# Altium PCB ON OFF CONTROL.PcbDoc
Units mm, origin at the board's own origin, x right, y up, seen from the top; angles counter-clockwise.
Board outline 47.07 x 105.01 mm, 2 copper layers (Top Layer, Bottom Layer); 35 components, 29 nets, 115 pads, 23 vias.
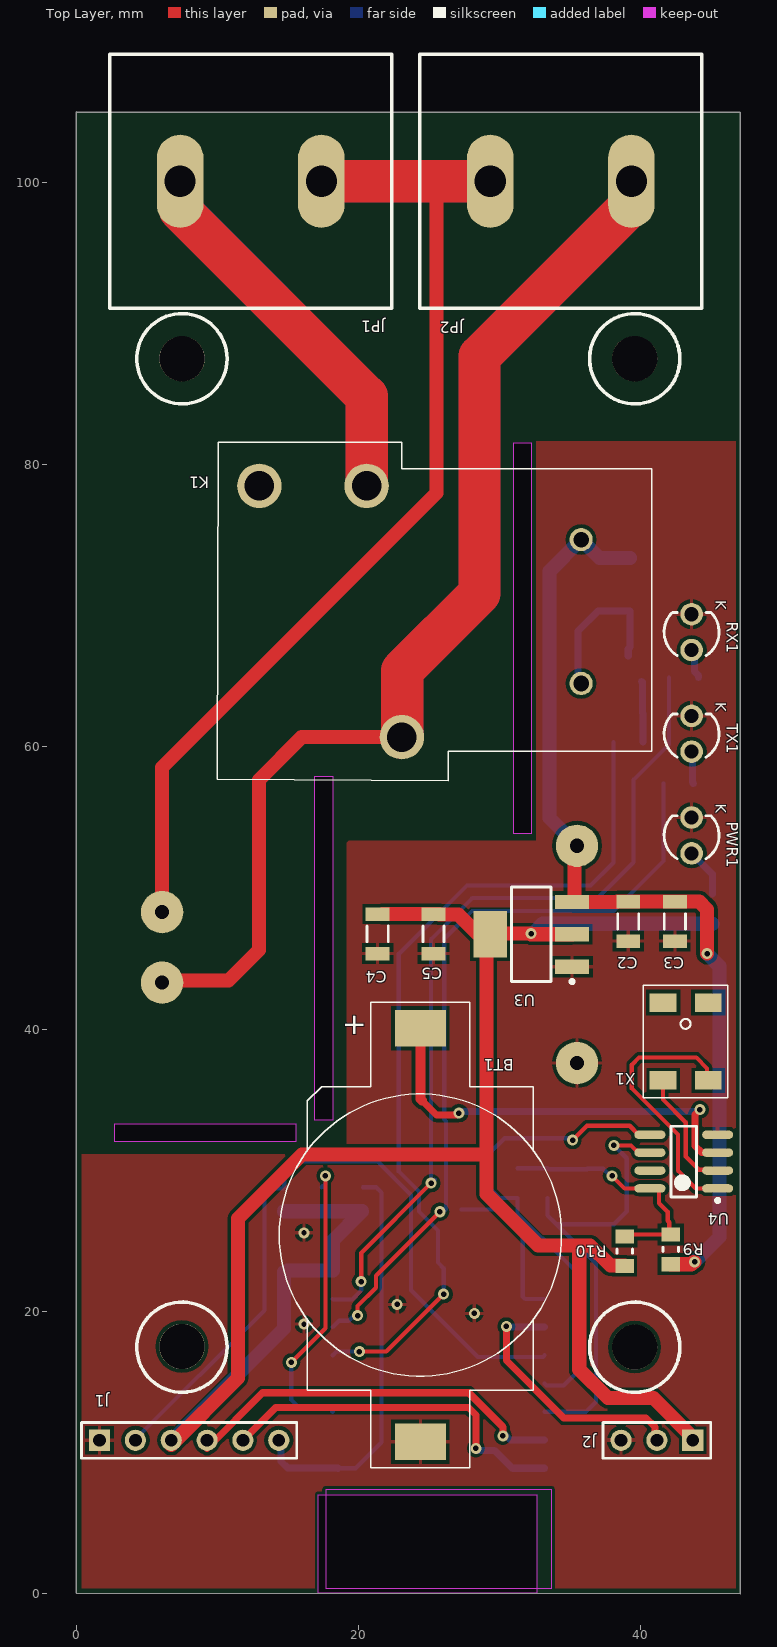
[diagram p0: Top Layer view]
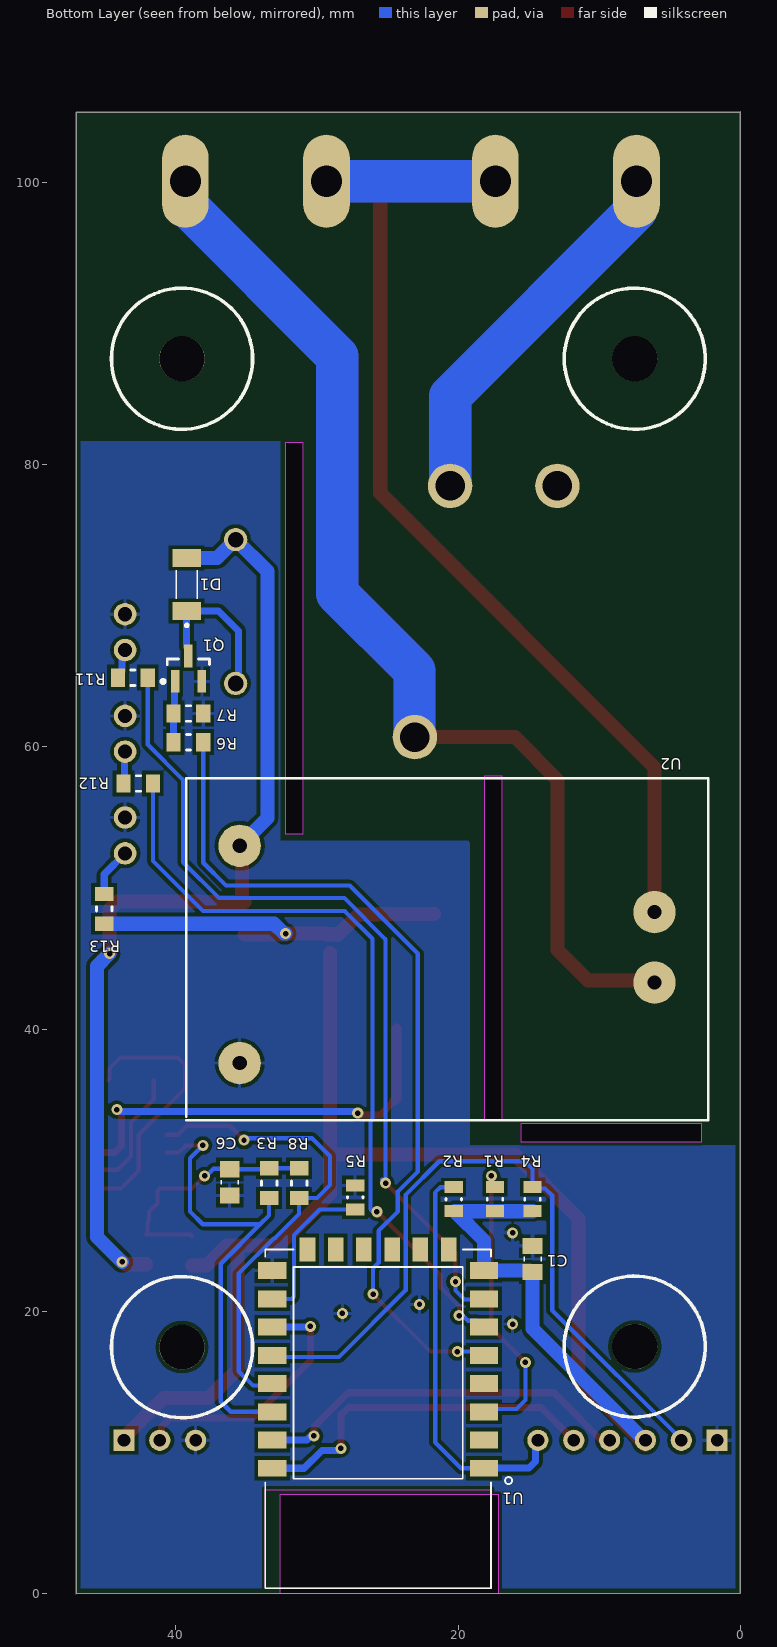
[diagram p1: Bottom Layer view, seen from below]

## Layer stack, top to bottom
Top Solder: solder mask 0.0102, Solder Resist, Dk 3.5
Top Layer: signal copper 0.0356
Dielectric 1: dielectric 0.32, FR-4, Dk 4.8
Bottom Layer: signal copper 0.0356
Bottom Solder: solder mask 0.0102, Solder Resist, Dk 3.5

## Board outline
0,0.004 0,104.994 0.005,104.972 47.059,104.972 47.068,104.979 47.068,-0.011 47.059,-0.018
cut-out: 15.557,32.004 2.73,32.004 2.73,33.274 15.557,33.274
cut-out: 16.891,33.528 16.891,57.912 18.161,57.912 18.161,33.528
cut-out: 32.258,81.534 32.258,53.848 30.988,53.848 30.988,81.534
cut-out: 17.145,0.004 17.145,6.985 32.639,6.985 32.639,0.004

## Design rules (kind name [scope] priority, off if disabled: settings)
Clearance [All] p1: gap=0.254 ignorepadtopadclearanceinfootprint=FALSE except(0: Arc-Hole Track-Hole SMDPad-Hole THPad-Hole Via-Hole Fill-Hole Poly-Hole Region-Hole Text-Hole)
HoleSize [All] p1: absolutevalues=TRUE maxlimit=4 minlimit=0.025 maxpercent=80.000 minpercent=20.000
MinimumSolderMaskSliver [All] p1: minsoldermaskwidth=0.1
PolygonConnect [All] p1: connectstyle=Relief reliefconductorwidth=0.254 reliefentries=4 polygonreliefangle="90 Angle" airgapwidth=0.254
RoutingVias [All] p1: holewidth=0.711 width=1.27 viastyle="Through Hole" minholewidth=0.711 minwidth=1.27 maxholewidth=0.711 maxwidth=1.27
SilkToSolderMaskClearance [IsPad] p1: minsilkscreentomaskgap=0.1 clearancetoexposedcopper=TRUE
SolderMaskExpansion [All] p1: expansion=0.102 istentingtop=FALSE
Width [All] p1: maxlimit=3 minlimit=0.254 preferedwidth=0.254
27 further rules are at their usual default settings.

## Components (designator, comment, footprint, x,y, rotation, side; value= is the part's Value field where it differs from the comment)
BT1 "BATTERY" CR2032_HOLDER_CH28 24.384,25.4 r90 top
C1 "08055C104KAJ2A" CAPC0805 14.732,23.7 r90 bottom
C2 "CAP 2.7uF 10V 1206(3216)" CAPC1206(3216)110_L 39.116,47.625 r90 top value=2.7uF
C3 "CAP 2.7uF 10V 1206(3216)" CAPC1206(3216)110_L 42.418,47.625 r90 top value=2.7uF
C4 "CAP 2.7uF 10V 1206(3216)" CAPC1206(3216)110_L 21.357,46.741 r90 top value=2.7uF
C5 "CAP 2.7uF 10V 1206(3216)" CAPC1206(3216)110_L 25.314,46.741 r90 top value=2.7uF
C6 "0.1UF" CAPC0805 36.195,29.133 r90 bottom
D1 "5.8V zener diode" BZT55B13GS08 39.243,71.501 r90 bottom
J1 "22-23-2061" HDR1X6 1.651,10.858 r0 top
J2 "Header 3" HDR1X3 43.688,10.858 r180 top (schematic designator P1)
JP1 "LOAD" "10 mm pitch" 17.366,100.076 r180 top
JP2 "LOAD" "10 mm pitch" 39.337,100.076 r180 top
K1 "Relays General Purpose Non Latching 12VDC SPDT 30A 250VAC Through Hole RoHS   Source:  Datasheet" R53G112DF1S 20.574,78.486 r180 top
PWR1 "LED" "Type 3mm" 43.605,53.721 r90 top
Q1 "BC847" SOT23-3 39.116,65.532 r90 bottom
R1 "2R55 1% 0805(2012)" RESC0805(2012)_L 17.399,27.94 r270 bottom value="2.55 Ohm"
R2 "2R55 1% 0805(2012)" RESC0805(2012)_L 20.32,27.94 r270 bottom value="2.55 Ohm"
R3 "4.7K" RESC0805 33.401,29.083 r270 bottom
R4 "2R55 1% 0805(2012)" RESC0805(2012)_L 14.732,27.94 r270 bottom value="2.55 Ohm"
R5 "2R55 1% 0805(2012)" RESC0805(2012)_L 27.305,28.067 r270 bottom value="2.55 Ohm"
R6 "1K" RESC0805 39.116,60.325 r180 bottom
R7 "100K" RESC0805 39.116,62.357 r180 bottom
R8 "4.7K" RESC0805 31.276,29.083 r270 bottom
R9 "0" RESC0805 42.128,24.384 r90 top
R10 "0" RESC0805 38.862,24.257 r90 top
R11 "1K" RESC0805 43.053,64.897 r180 bottom
R12 "1K" RESC0805 42.672,57.404 r180 bottom
R13 "1K" RESC0805 45.085,48.514 r270 bottom
RX1 "LED" "Type 3mm" 43.605,68.126 r90 top
TX1 "LED" "Type 3mm" 43.605,60.923 r90 top
U1 "ESP8266-12E/ESP-12E" *XCVR_ESP8266-12E/ESP-12E 25.68,15.875 r0 bottom
U2 "230v to5v" 230V-5V 21.209,44.704 r0 bottom
U3 "LM1117MPX-3.3" MP04A_N 32.235,46.713 r180 top
U4 "DS1307" SOIC8 43.053,30.607 r180 top
X1 "32.768" CRYSTAL_32.768_SMD 43.18,39.116 r90 top

## Footprints (in the part's own frame and the unit in brackets; to place one, negate y for a bottom-side part, rotate by r counter-clockwise, add the part's x,y. Pads: shape width x height; smd on the part's side, far side on the other; paste and mask are expansions set on the pad)
"10 mm pitch" [mm]
  oval 3.3x6.6 hole 2.2: 1(0,0) 2(10,0)
  silkscreen extent -5,-9 15,9
230V-5V [mm]
  round 3 hole 1: 1(-15.123,1.419) 2(-15.123,-3.581) 3(14.277,7.119) 4(14.277,-8.281)
  silkscreen extent -18.92,-13.08 18.08,11.18
*XCVR_ESP8266-12E/ESP-12E [mm]
  rect 2x1.2 smd: 1(-7.5,7) 2(-7.5,5) 3(-7.5,3) 4(-7.5,1) 5(-7.5,-1) 6(-7.5,-3) 7(-7.5,-5) 8(-7.5,-7) 15(7.5,-7) 16(7.5,-5) 17(7.5,-3) 18(7.5,-1) 19(7.5,1) 20(7.5,3) 21(7.5,5) 22(7.5,7)
  rect 1.1x1.7 smd: 9(-5,-8.5) 10(-3,-8.5) 11(-1,-8.5) 12(1,-8.5) 13(3,-8.5) 14(5,-8.5)
  Keep-Out Layer region: -8.009,15.5 8,15.5 8,8.51 -8.009,8.51
  Keep-Out Layer region: -8.009,15.5 8,15.5 8,8.51 -8.009,8.51
  Keep-Out Layer region: -8.009,15.5 8,15.5 8,8.51 -8.009,8.51
  Keep-Out Layer region: -8.009,15.5 8,15.5 8,8.51 -8.009,8.51
  Keep-Out Layer region: -8.009,15.5 8,15.5 8,8.51 -8.009,8.51
  Keep-Out Layer region: -8.009,15.5 8,15.5 8,8.51 -8.009,8.51
  silkscreen extent -9.5,-8.5 8,15.5
BZT55B13GS08 [mm]
  rect 1.25x2 smd: 1(-1.875,0) 2(1.875,0)
  silkscreen extent -3,-0.75 1,0.75
CAPC0805 [mm]
  rect 1.15x1.4 smd: 1(-0.925,0) 2(0.925,0)
  silkscreen extent -0.15,-0.6 0.15,0.6, body extent -1.1,-0.67 1.1,0.67, height 0.8
CAPC1206(3216)110_L [mm] "Chip Capacitor, Body 3.2x1.6mm, Height 1.1mm, IPC High Density"
  rect 0.95x1.7 smd: 1(-1.4,0) 2(1.4,0)
  silkscreen extent -0.55,-0.75 0.55,0.75, body extent -1.7,-0.9 1.7,0.9, height 1.1
CR2032_HOLDER_CH28 [mm]
  rect 2.6x3.6 smd: 1(14.65,0) 2(-14.65,0)
  silkscreen extent -16.5,-10 16.5,10, body extent -16.5,-10 16.5,10, height 7
CRYSTAL_32.768_SMD [mm]
  rect 1.3x1.9 smd: 1(-2.75,-1.6) 2(-2.75,1.6) ""(2.75,-1.6) ""(2.75,1.6)
  silkscreen extent -4,-3 4,3, body extent -4,-1.75 4,1.75, height 2.5
HDR1X3 [mm] "Connector; Header; 3 Position"
  rect 1.5x1.5 hole 0.9: 1(0,0)
  round 1.5 hole 0.9: 2(2.54,0) 3(5.08,0)
  silkscreen extent -1.27,-1.27 6.35,1.27
HDR1X6 [mm] "Connector; Header; 6 Position"
  rect 1.5x1.5 hole 0.9: 1(0,0)
  round 1.5 hole 0.9: 2(2.54,0) 3(5.08,0) 4(7.62,0) 5(10.16,0) 6(12.7,0)
  silkscreen extent -1.27,-1.27 13.97,1.27
MP04A_N [mm] "SOT223, 4-Leads, Body 6.5x3.5mm, Pitch 2.3mm, Lead Span 7mm, IPC Medium Density"
  rect 2.4x1 smd: 1(-2.9,2.3) 2(-2.9,0) 3(-2.9,-2.3)
  rect 2.4x3.3 smd: 4(2.9,0)
  silkscreen extent -3.03,-3.35 1.4,3.47, body extent -1.86,-3.35 1.86,3.35, height 1.8
R53G112DF1S [mm]
  round 3.15 hole 2.1: 1(0,0) 2(7.6,0) 3(-2.5,17.8)
  round 1.65 hole 1.1: 4(-15.2,3.8) 5(-15.2,14)
  silkscreen extent -20.2,-3.1 10.6,20.9
RESC0805 [mm]
  rect 1x1.3 smd: 1(-1.05,0) 2(1.05,0)
  silkscreen extent -0.15,-0.55 0.15,0.55, body extent -1.1,-0.62 1.1,0.63, height 0.6
RESC0805(2012)_L [mm] "Chip Resistor, Body 2.0x1.3mm, IPC High Density"
  rect 0.85x1.3 smd: 1(-0.85,0) 2(0.85,0)
  silkscreen extent -0.05,-0.55 0.05,0.55, body extent -1.1,-0.67 1.1,0.68, height 0.7
SOIC8 [mm]
  oval 2.2x0.6 smd: 1(-2.4,1.905) 2(-2.4,0.635) 3(-2.4,-0.635) 4(-2.4,-1.905) 5(2.4,-1.905) 6(2.4,-0.635) 7(2.4,0.635) 8(2.4,1.905)
  silkscreen extent -2.53,-2.5 0.9,2.88, body extent -2,-2.5 2,2.5, height 1.75
SOT23-3 [mm]
  rect 1.6x0.6 smd: 1(-0.9,0.95) 2(-0.9,-0.95) 3(0.9,0)
  silkscreen extent -1.02,-1.5 0.7,1.93, body extent -0.7,-1.5 0.7,1.5, height 1.1
"Type 3mm" [mm] "THT, LED-3mm, 2pin- Body 4.15mm(max)"
  round 1.6 hole 1: 1(1.27,0) 2(-1.27,0)
  silkscreen extent -1.66,-1.95 1.4,1.95, body extent -1.93,-1.94 1.87,1.94, height 10.5

## Part data
C1: library part CMP-2007-04765-1, Manufacturer="AVX Interconnect / Elco", Part Number=08055C104KAJ2A
C2 C3 C4 C5: library part CMP-1037-04841-1, "CAP 2.7uF 10V ±10% 1206 (3216 Metric) Thickness 1.05mm SMD", Case-EIA=1206, Case-Metric=3216, Rated Voltage="10 V", Tolerance=Â±10%, Max Thickness="1.05 mm", Technology=SMT
C6: library part "CAP NP"
D1: library part DIODE
J1: library part CMP-2000-05536-1, "Male Header, Pitch 2.54 mm, 1 x 6 Position, Height 10.67 mm, Tail Length 3.56 mm, 0 to 70 degC, RoHS, Bulk", Current Rating=4A, Manufacturer=Molex, Package Description="Male Header, Pitch 2.54 mm, 1 x 6 Position, Height 10.67 mm, Tail Length 3.56 mm", Voltage Rating=250V, =002223206122-23-2061-PBA-6373-06A102, Brand=Molex, Contact Material=Brass, Contact Plating=Tin, Datasheet URL=https://datasheet.ciiva.com/19460/232303-19460895.pdf, Datasheet Version="Rev. P, 09/2001", Factory Pack Quantity=1000, Housing Material=Nylon, Manufacturer URL=http://www.molex.com/, Mounting Angle=Vertical, Mounting Style=ThroughHole, Mounting Technology=ThroughHole, Number of Positions=6, Number of Positions / Contacts=6, Number of Rows=1, Package Reference=22-23-2061, Packaging=Bulk, Pitch=2.54mm, Product Category=.100K.K.Connectors, Product Type=Headers, RoHS=Details, Series=6373, Termination Style=ThroughHole, Tradename=KK, Type=PinStrip
J2: "Header, 3-Pin", LatestRevisionDate=17-Jul-2002, LatestRevisionNote="Re-released for DXP Platform.", Publisher="Altium Limited"
JP1 JP2: library part "HEADER 2"
K1: library part R53G-112DF-1-S, Manufacturer_Name=WRG(Wangrong), Package=R53G112DF1S, DeviceSetName=R53G-112DF-1-S, GateName_1=G$1, Height=20.3mm, LibraryName=R53G-112DF-1-S, Manufacturer_Part_Number=R53G-112DF-1-S, SymbolName_1=R53G-112DF-1-S
Q1: library part "NPN BEC"
R1 R2 R4 R5: library part CMP-1013-00215-1, "2R55 0.125W 1% 0805 (2012 Metric)  SMD", Case-EIA=0805, Case-Metric=2012, Power="0.125 W", Tolerance="1 %", Technology=SMT
R3 R6 R7 R8 R9 R10 R11 R12 R13: library part RES1, "RESISTOR"
U1: "This WiFi module has a 32-bit MCU micro and clock speeds supporting 80 MHz or 160 MHz. Supports the RTOS and integrated Wi-Fi MAC/BB/RF/PA/LNA, and has an on-board antenna.", Package=None, Availability=Unavailable, MF=AI-Thinker, MP=ESP8266-12E/ESP-12E, Price=None, SnapEDA_Link=https://www.snapeda.com/parts/ESP8266-12E/ESP-12E/AI-Thinker/view-part/?ref=snap
U3: library part CMP-0062-01659-3, "800mA Low-Dropout Linear Regulator, 4-pin SOT-223", Manufacturer="National Semiconductor", PackageTopMarking=XYTT*N05A, PowerWise=N, Code_IPC=SOT223-4, Code_JEDEC=TO-261-AA, ComponentLink1Description="Manufacturer URL", ComponentLink1URL=http://www.national.com/, ComponentLink2Description="LM1117 Datasheet", ComponentLink2URL=http://www.national.com/ds/LM/LM1117.pdf, ComponentLink3Description="LM1117 Web Page", ComponentLink3URL=http://www.national.com/pf/LM/LM1117.html, ComponentLink4Description="MP04A Package Page", ComponentLink4URL=http://www.national.com/packaging/folders/mp04a.html, CompType="LDO IC", DatasheetVersion=Apr-2006, High-Reliability=Y, PackageDescription="Molded SOT-223, 6.50 x 3.56 x 1.6mm Body, 4 Lead, 2.3mm Pitch", PackageReference=MP04A, PackageVersion="revB, Apr-2003", PartNumber=LM1117MPX-3.3, PinCount=4, RevisionNote="SCH symbol layout adjusted", RoHS=N
X1: library part CRYSTAL

## Free pads (board coordinates)
  round 3.2 hole 3.2: ""(7.491,17.5) ""(7.491,87.5) ""(39.573,17.456) ""(39.573,87.499)

## Via types
v1: diameter 0.781, hole 0.385, Top Layer to Bottom Layer, tented both sides, 23 vias

## Nets (pads, with @x,y where several pads share a name; then routed paths per layer and width w, separated by ;. In a path a pad name is that pad's centre, name@x,y a point inside that pad or via, vN(x,y) a via of type N, cw(c..) or ccw(c..) an arc to the next point about the centre after c; other vN are vias at no path point)
+3.3V: C1.1 C4.2 C5.2 J1.3 J2.1 R1.2 R2.2 R4.2 R10.1 R13.2 U1.8 U3.2 U3.4 | length 142
  Top Layer w1: J1.3@6.731,10.541 11.469,15.279 11.469,26.582 15.994,31.107 29.081,31.107 ; C4.2@21.738,48.141 C5.2 25.695,48.141 25.72,48.116 27.068,48.116 28.471,46.713 U3.4 29.381,46.759 v1(32.235,46.759) ; U3.4@29.081,45.385 29.081,31.107 ; v1@32.235,46.713 U3.2 ; R10.1@38.862,23.241 37.846,23.241 36.418,24.669 35.646,24.669 ; J2.1 43.688,11.049 40.894,13.843 37.678,13.843 35.646,15.875 35.646,23.461 35.646,24.669 ; 29.081,31.107 29.081,28.323 32.735,24.669 35.646,24.669
  Bottom Layer w1: J1.3@6.731,10.783 14.732,18.784 C1.1 14.857,22.775 14.957,22.875 U1.8 18.18,25.025 20.245,27.09 R1.2 R4.2 ; v1(32.235,46.759) 32.354,46.759 33.059,47.464 R13.2
+5V: C2.2 C3.2 D1.2 K1.4 R9.1 U2.4 U3.3 | length 69.1
  Top Layer w1: U3.3 U3.3@35.311,49.013 ; U2.4 35.311,52.81 U3.3@35.311,49.013 ; R9.1 43.581,23.334 43.742,23.495 v1(43.815,23.495) ; v1(44.704,45.339) 44.704,48.467 44.146,49.025 C3.2 C2.2 38.354,49.025 38.342,49.013 U3.3@35.311,49.013
  Bottom Layer w1: U2.4 33.528,54.943 33.528,72.44 K1.4 37.084,73.376 D1.2 ; v1(43.815,23.495) 45.593,25.273 45.593,44.45 v1(44.704,45.339)
CLK_1HZ: U4.7
DEBUGTX\: J2.2 U1.17 | length 18.6
  Top Layer w0.5: v1(30.48,18.923) 30.48,16.51 34.544,12.446 40.386,12.446 41.021,11.811 41.021,10.985 J2.2
  Bottom Layer w0.5: v1(30.48,18.923) 30.607,18.923 30.655,18.875 U1.17
DTR: J1.2 R4.1 U1.18 | length 52.6
  Bottom Layer w0.3: J1.2@4.064,10.795 13.335,20.066 13.335,28.194 13.843,28.702 14.644,28.702 R4.1 14.732,30.077 15.289,30.634 21.342,30.634 23.727,28.25 23.727,21.485 28.448,16.764 33.069,16.764 U1.18
GND: BT1.2 C1.2 C2.1 C3.1 C4.1 C5.1 C6.1 J1.1 J2.3 PWR1.1 Q1.2 R5.1 R7.2 RX1.1 TX1.1 U1.15 U2.3 U3.1 U4.4
  other v1: 16.141,19.086 28.206,19.848 22.745,20.483 16.141,25.563
I2C_SCL: R3.2 U1.20 U4.6 | length 33
  Top Layer w0.3: v1(38.1,31.75) 39.313,31.75 39.821,31.242 U4.6
  Bottom Layer w0.3: U1.20 36.116,12.875 36.83,13.589 36.83,23.368 34.036,26.162 ; R3.2 33.401,26.797 34.036,26.162 ; v1(38.1,31.75) 39.012,30.838 39.012,27.074 38.1,26.162 34.036,26.162
I2C_SDA: R8.2 U1.19 U4.5 | length 34.4
  Top Layer w0.3: v1(35.179,32.131) 36.195,33.147 39.218,33.147 39.853,32.512 U4.5
  Bottom Layer w0.3: U1.19 33.323,14.732 34.544,14.732 35.56,15.748 35.56,22.667 33.071,25.156 33.01,25.156 31.276,26.89 R8.2 30.006,28.033 29.083,28.956 29.083,30.988 30.353,32.258 35.052,32.258 v1(35.179,32.131)
LEDRX: R11.2 U1.7 | length 60.3
  Top Layer w0.3: v1(20.193,22.098) 20.193,24.13 v1(25.146,29.083)
  Bottom Layer w0.3: U1.7 18.228,20.828 19.558,20.828 20.193,21.463 v1(20.193,22.098) ; v1@25.4,29.337 v1(25.146,29.083) 25.146,46.355 28.067,49.276 36.957,49.276 39.497,51.816 39.497,57.658 42.003,60.164 R11.2
LEDTX: R12.2 U1.6 | length 54.9
  Top Layer w0.3: v1(19.939,19.685) 19.939,20.375 21.232,21.668 21.232,22.517 v1(25.766,27.051)
  Bottom Layer w0.3: U1.6 18.63,19.325 19.316,19.325 19.677,19.685 v1(19.939,19.685) ; v1(25.766,27.051) 26.032,27.051 26.208,27.227 26.208,33.479 26.081,33.606 26.081,46.401 28.048,48.368 38.081,48.368 41.622,51.909 R12.2
NC_2: K1.2
NetBT1_1: BT1.1 U4.3 | length 30
  Top Layer w0.5: 24.511,34.925 25.527,33.909 26.993,33.909 v1(27.12,34.036) ; v1(44.196,34.29) 43.849,33.943 43.849,31.716 44.323,31.242 U4.3
  Top Layer w0.7: BT1.1 24.384,35.052 24.511,34.925
  Bottom Layer w0.5: v1(27.12,34.036) 27.247,34.163 44.069,34.163 v1(44.196,34.29)
NetC6_2: C6.2 R3.1 R8.1 R9.2 R10.2 U4.8 | length 17.5
  Top Layer w0.3: v1(37.973,29.591) 38.862,28.702 U4.8 41.164,28.702 41.303,28.563 41.303,27.658 41.91,27.051 41.91,26.414 42.019,26.305 42.019,25.543 R9.2 38.989,25.434 R10.2
  Bottom Layer w0.3: R8.1 R3.1 33.476,30.058 C6.2 36.236,30.099 37.338,30.099 37.846,29.591 v1(37.973,29.591)
NetD1_1: D1.1 K1.5 Q1.3 | length 11.4
  Top Layer w0.5: K1.5 K1.5@35.804,64.516
  Bottom Layer w0.5: K1.5@35.791,64.503 K1.5 35.56,64.7 35.56,68.199 36.987,69.626 D1.1 39.243,67.059 39.116,66.932 Q1.3
NetPWR1_1: PWR1.2 R13.1 | length 3.5
  Bottom Layer w0.5: PWR1.2 45.085,50.971 R13.1
NetQ1_1: Q1.1 R6.1 R7.1 | length 4.3
  Bottom Layer w0.5: Q1.1 40.116,64.582 40.116,62.407 R7.1 R6.1
NetR1_1: R1.1 U1.3 | length 21.1
  Top Layer w0.3: v1(15.24,16.383) 17.653,18.796 v1(17.653,29.595)
  Bottom Layer w0.3: v1(15.24,16.383) 15.24,13.716 15.875,13.081 17.974,13.081 U1.3 ; R1.1 17.653,29.044 v1(17.653,29.595)
NetR5_2: R5.2 U1.16 | length 11
  Bottom Layer w0.3: R5.2 29.81,27.217 31.634,25.392 31.634,21.051 31.81,20.875 U1.16
NetR11_1: R11.1 RX1.2 | length 2.2
  Bottom Layer w0.5: RX1.2 43.816,66.645 43.816,65.334 44.103,65.047 R11.1
NetR12_1: R12.1 TX1.2 | length 2.3
  Bottom Layer w0.5: TX1.2 43.664,59.595 43.664,57.462 R12.1
NetU4_1: U4.1 X1.1 | length 18.9
  Top Layer w0.3: X1.1 44.704,36.442 44.704,37.211 43.942,37.973 39.878,37.973 39.37,37.465 39.37,35.791 42.641,32.52 42.641,29.964 43.903,28.702 U4.1
NetU4_2: U4.2 X1.2 | length 8.7
  Top Layer w0.3: X1.2 41.58,35.001 43.195,33.386 43.195,30.973 44.139,30.029 45.396,30.029 U4.2
NEUTRAL: JP1.1 JP2.2 U2.2 | length 84.1
  Top Layer w1: U2.2 6.086,58.537 25.527,77.978 25.527,99.314 24.765,100.076
  Top Layer w3: JP1.1 24.765,100.076 JP2.2
  Bottom Layer w3: JP1.1 JP2.2
NO_2: JP1.2 K1.1 | length 54.1
  Top Layer w3: JP1.2 7.366,98.044 20.574,84.836 K1.1
  Bottom Layer w3: JP1.2 7.423,100.019 7.423,97.987 20.574,84.836 K1.1
PHASE: JP2.1 K1.3 U2.1 | length 123.5
  Top Layer w1: U2.1 6.235,43.434 10.795,43.434 12.954,45.593 12.954,57.658 15.982,60.686 K1.3
  Top Layer w3: K1.3 23.103,60.715 23.103,65.394 28.575,70.866 28.575,87.664 39.337,98.426 JP2.1
  Bottom Layer w3: K1.3 23.103,60.715 23.103,65.394 28.575,70.866 28.575,87.664 39.337,98.426 JP2.1
RELAY: R6.2 U1.5 | length 61.5
  Top Layer w0.3: v1(20.066,17.145) 21.971,17.145 v1(26.035,21.209)
  Bottom Layer w0.3: U1.5 18.451,17.145 v1(20.066,17.145) ; v1(26.035,21.209) 26.035,23.049 25.635,23.45 25.635,25.713 24.281,27.067 24.281,28.479 22.86,29.9 22.86,45.339 27.686,50.165 36.449,50.165 38.066,51.782 R6.2
RST: J1.6 R2.1 U1.1 | length 28.8
  Bottom Layer w0.3: U1.1@18.542,8.875 19.797,8.875 21.634,10.712 21.634,28.404 21.248,28.79 R2.1
  Bottom Layer w0.5: J1.6 14.518,10.691 14.518,9.358 14.986,8.89 18.527,8.89 U1.1@18.542,8.875
RX: J1.4 U1.21 | length 27.3
  Top Layer w0.5: J1.4@9.271,10.287 13.208,14.224 27.813,14.224 30.226,11.811 v1(30.226,11.176)
  Bottom Layer w0.5: v1(30.226,11.176) 30.434,11.176 30.735,10.875 U1.21
TX: J1.5 U1.22 | length 25.5
  Top Layer w0.5: J1.5 14.136,13.183 27.788,13.183 28.321,12.65 v1(28.321,10.287)
  Bottom Layer w0.5: v1(28.321,10.287) 28.468,10.14 29.652,10.14 30.916,8.875 U1.22
pads on no net: U1.2 U1.4 U1.9 U1.10 U1.11 U1.12 U1.13 U1.14 X1.

## Polygon pours and split planes (outlines as drawn)
GND on Top Layer "GND_L01_P000" (solid, pour order 0): 0.381,0.381 46.736,0.381 46.736,81.661 32.63,81.661 32.599,81.692 32.599,53.38 32.639,53.34 19.304,53.34 19.177,53.213 19.177,31.115 0.381,31.115
GND on Bottom Layer "GND_L02_P001" (solid, pour order 1): 0.381,0.381 46.736,0.381 46.736,81.661 32.63,81.661 32.599,81.692 32.599,53.38 32.639,53.34 19.304,53.34 19.177,53.213 19.177,31.75 0.381,31.75

## Silkscreen, mask and mechanical layers (free items; w line width, h text height)
Top Overlay:
  circle w0.254: c39.573,17.456 r3.2
  circle w0.254: c7.491,17.457 r3.2
  circle w0.254: c7.491,87.5 r3.2
  circle w0.254: c39.573,87.499 r3.2
Bottom Overlay:
  circle w0.254: c39.573,17.456 r5
  circle w0.254: c7.491,17.5 r5
  circle w0.254: c7.491,87.5 r5
  circle w0.254: c39.573,87.499 r5
Mechanical 1:
  lines w0.2: 0,0.004 0,104.994 ; 0.005,-0.018 47.059,-0.018 ; 0.005,104.972 47.059,104.972 ; 47.068,-0.011 47.068,104.979

## Text inside footprints (layer, text, board x,y; h text height)
BT1: Top Overlay "+" at 20.384,39.4 h1.5 r90
PWR1: Top Overlay "K" at 45.314,55.966 h0.76 r270; Mechanical 15 "K" at 44.875,56.261 h0.76 r90
RX1: Top Overlay "K" at 45.314,70.371 h0.76 r270; Mechanical 15 "K" at 44.875,70.666 h0.76 r90
TX1: Top Overlay "K" at 45.314,63.168 h0.76 r270; Mechanical 15 "K" at 44.875,63.463 h0.76 r90